# Altium PCB PCB1.PcbDoc
Units mm, origin at the board's own origin, x right, y up, seen from the top; angles counter-clockwise.
Board outline 46.1 x 19.94 mm, 4 copper layers (Top Layer, 5V, GND, Bottom Layer), stack 0.603 mm thick; 34 components, 41 nets, 163 pads, 40 vias.
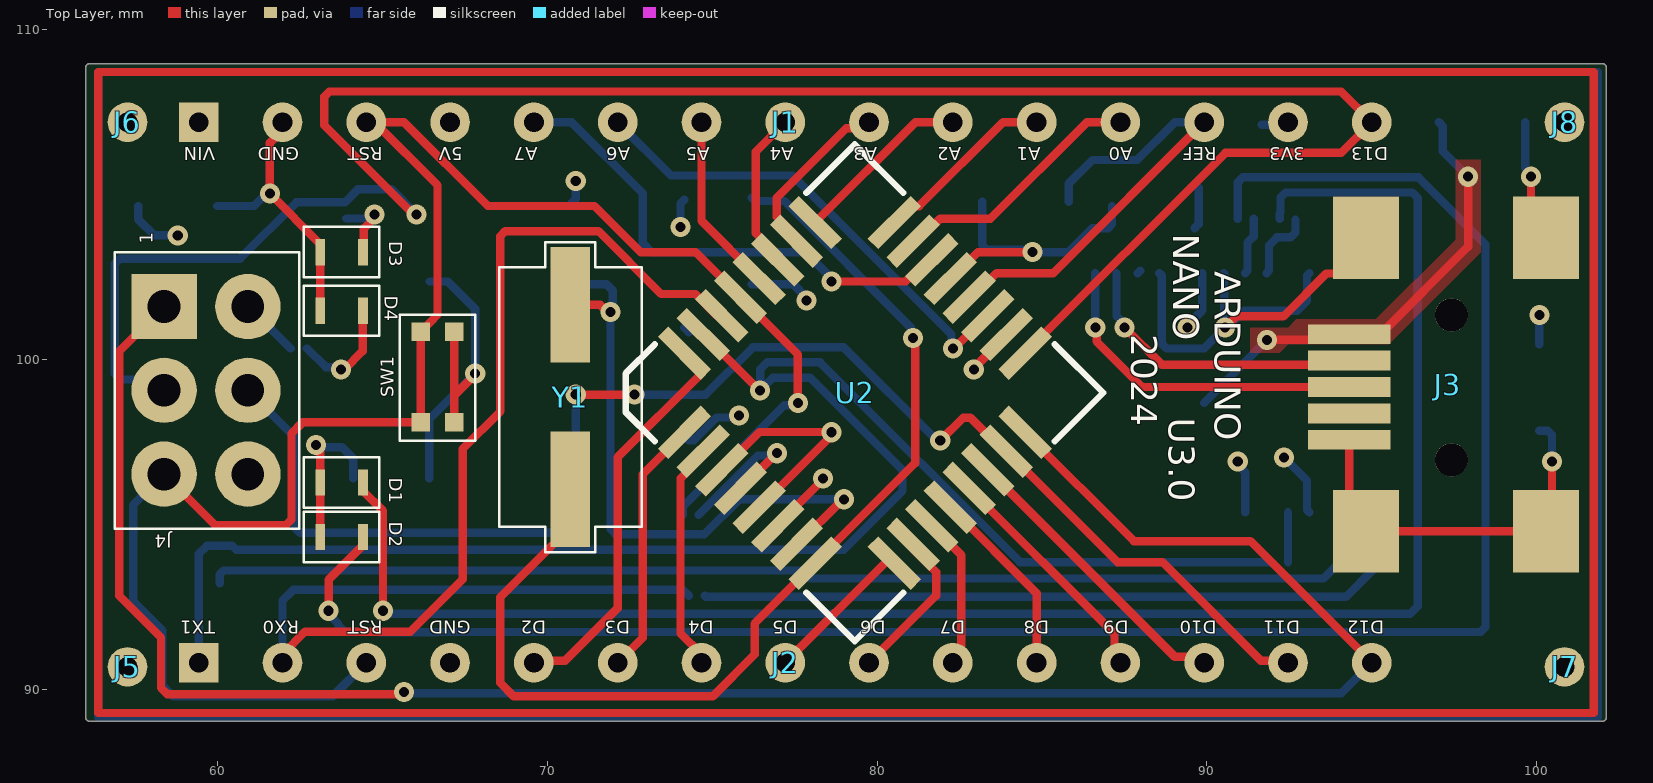
[diagram p0: Top Layer view]
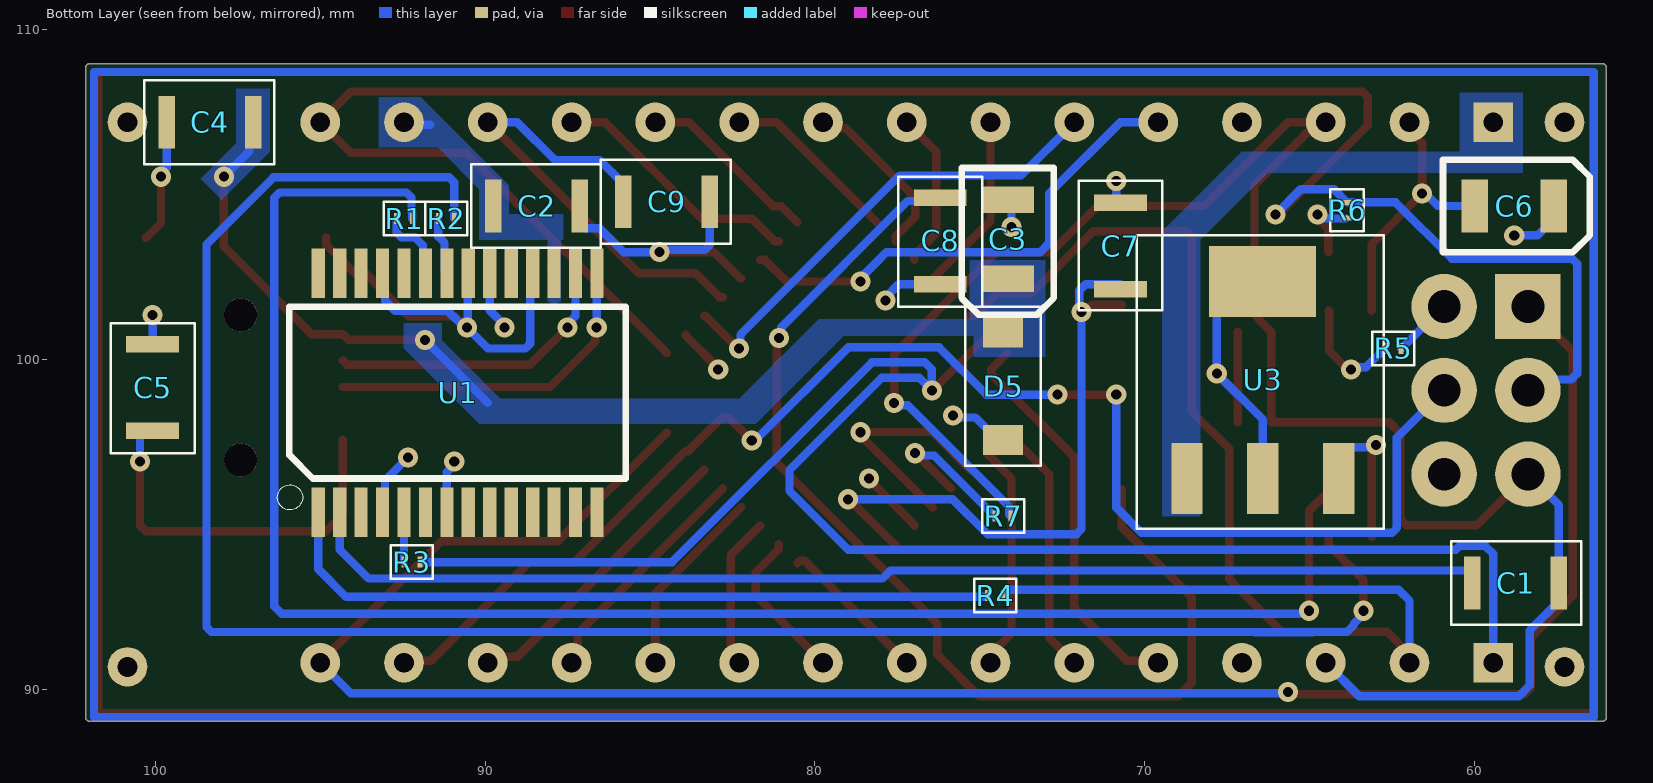
[diagram p1: Bottom Layer view, seen from below]
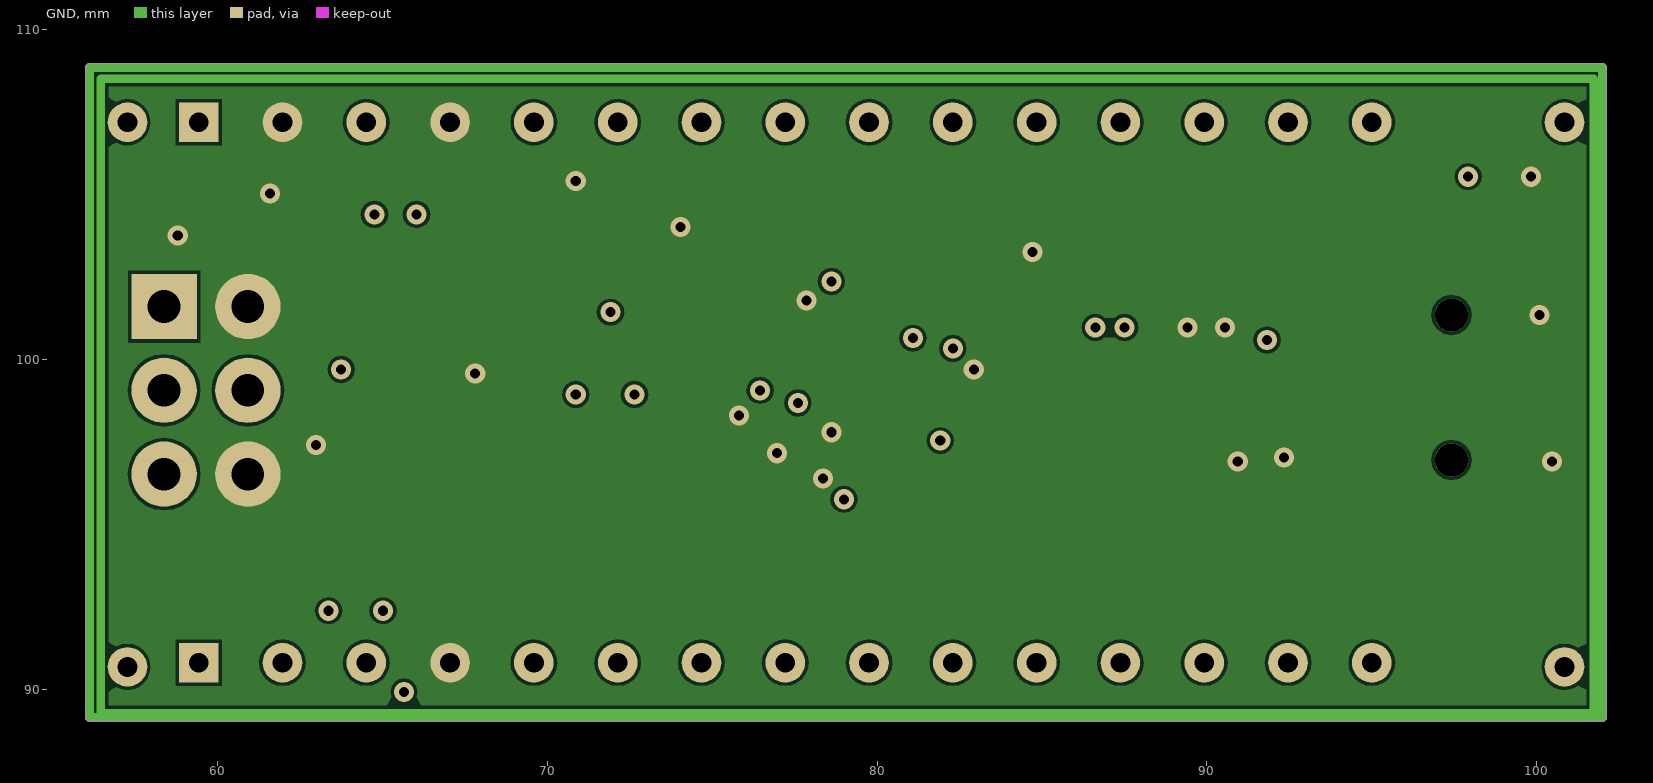
[diagram p2: GND]
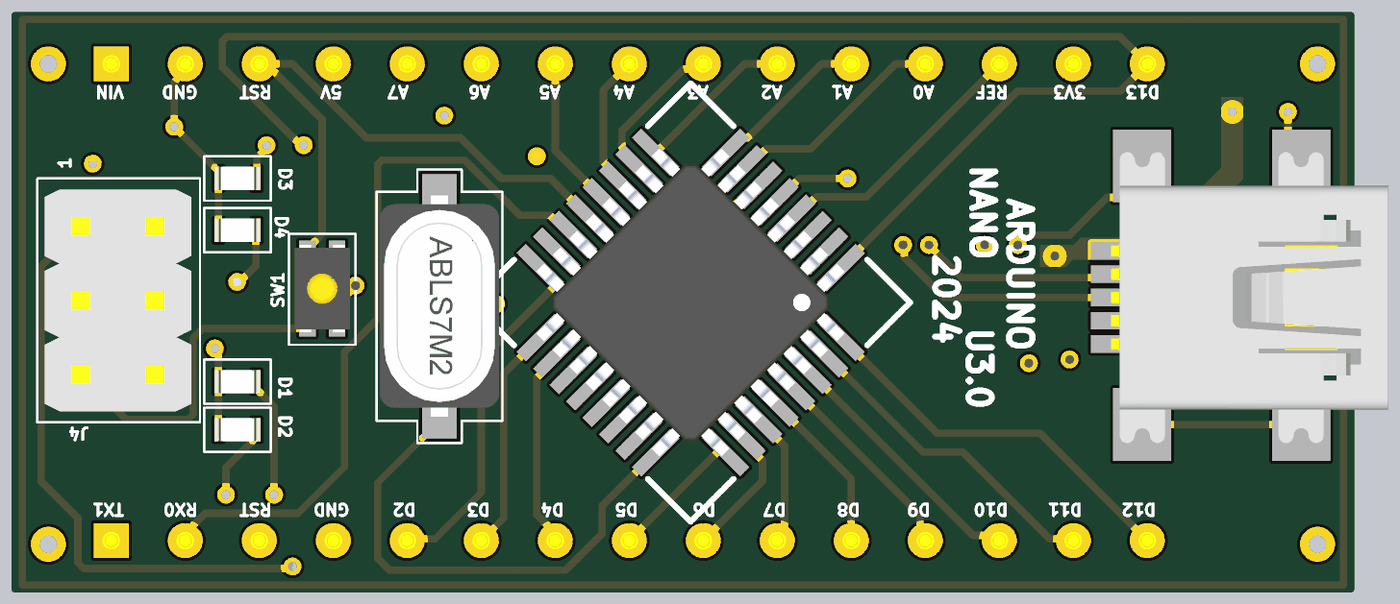
[diagram p3: 3D render of the assembled board from above, using the file's embedded part models]
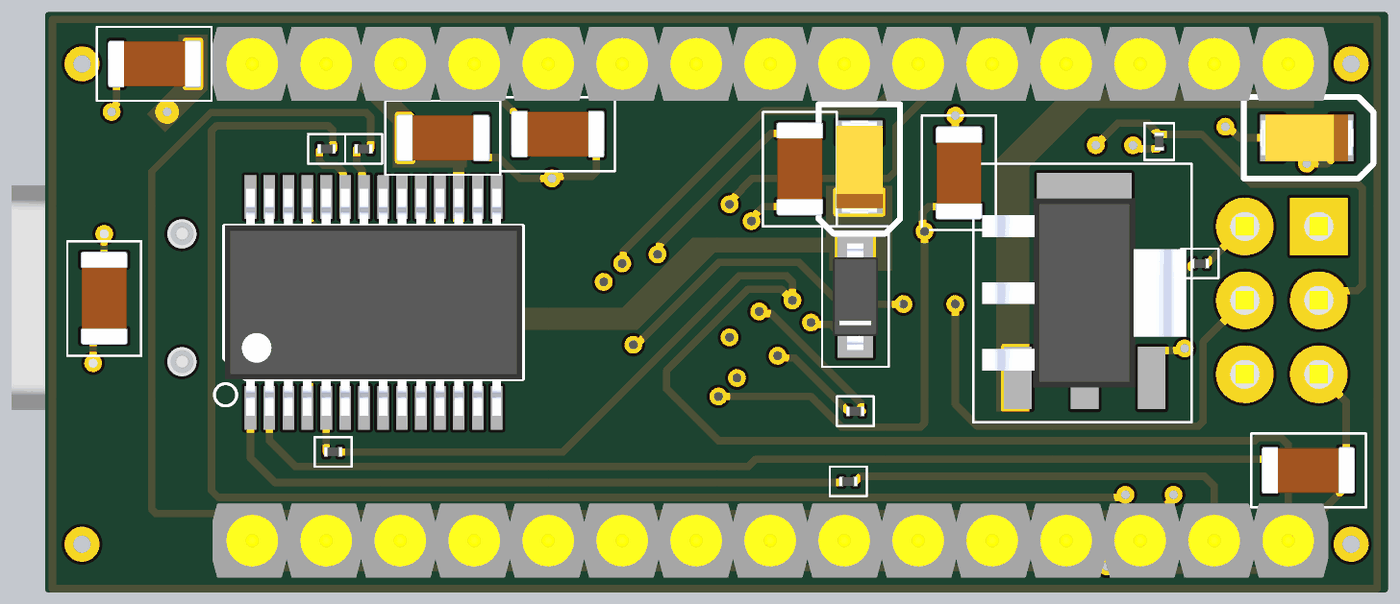
[diagram p4: 3D render of the assembled board from below, using the file's embedded part models]

## Layer stack, top to bottom
Top Solder: solder mask 0.0102, Solder Resist, Dk 3.5
Top Layer: signal copper 0.0356
Dielectric 2: prepreg 0.0711, PP-006, Dk 4.1
5V: signal copper 0.035
Dielectric 1: dielectric 0.32, FR-4, Dk 4.8
GND: signal copper 0.035
Dielectric 3: prepreg 0.0711, PP-006, Dk 4.1
Bottom Layer: signal copper 0.0356
Bottom Solder: solder mask 0.0102, Solder Resist, Dk 3.5

## Board outline
56.134,89.027 cw(c56.134,89.154) 56.007,89.154 56.007,108.839 cw(c56.134,108.839) 56.134,108.966 101.981,108.966 cw(c101.981,108.839) 102.108,108.839 102.108,89.154 cw(c101.981,89.154) 101.981,89.027

## Design rules (kind name [scope] priority, off if disabled: settings)
Clearance Clearance_3 [InNamedPolygon('3V3_L04_P004')] p1: gap=0.254 ignorepadtopadclearanceinfootprint=FALSE
Clearance POO [InNamedPolygon('NONET_L02_P002')] p2: gap=0.2 ignorepadtopadclearanceinfootprint=FALSE
Clearance Clearance_2 [InNamedPolygon('NONET_L02_P002')] p3: gap=0.2 ignorepadtopadclearanceinfootprint=FALSE
Clearance POLY_1 [InNamedPolygon('5V_L02_P001')] p4: gap=0.2 ignorepadtopadclearanceinfootprint=FALSE
Clearance Clearance_1 [InNamedPolygon('NONET_L01_P001')] p5: gap=0.254 ignorepadtopadclearanceinfootprint=FALSE
Clearance polyy [InNamedPolygon('NONET_L01_P001')] p6: gap=0.15 ignorepadtopadclearanceinfootprint=FALSE
Clearance poly [InNamedPolygon('NONET_L01_P001')] p7: gap=0.254 ignorepadtopadclearanceinfootprint=FALSE
Clearance [All] p8: gap=0.1 ignorepadtopadclearanceinfootprint=FALSE
PolygonConnect PolygonConnect_11 [All vs IsNamedPolygon('VIN_L04_P008')] p1: thpad.connectstyle=Direct thpad.reliefconductorwidth=0.254 thpad.reliefentries=4 thpad.polygonreliefangle="90 Angle" thpad.airgapwidth=0.254 smdpad.connectstyle=Direct smdpad.reliefconductorwidth=0.254 smdpad.reliefentries=4 smdpad.polygonreliefangle="90 Angle" smdpad.airgapwidth=0.254 via.connectstyle=Relief via.reliefconductorwidth=0.254 via.reliefentries=4 via.polygonreliefangle="90 Angle" via.airgapwidth=0.254
PolygonConnect PolygonConnect_10 [All vs IsNamedPolygon('VUSB_L04_P007')] p2: connectstyle=Direct reliefconductorwidth=0.254 reliefentries=4 polygonreliefangle="90 Angle" airgapwidth=0.254
PolygonConnect PolygonConnect_9 [All vs IsNamedPolygon('VUSB_L01_P006')] p3: connectstyle=Direct reliefconductorwidth=0.254 reliefentries=4 polygonreliefangle="90 Angle" airgapwidth=0.254
PolygonConnect PolygonConnect_8 [All vs IsNamedPolygon('VUSB_L04_P005')] p4: connectstyle=Direct reliefconductorwidth=0.254 reliefentries=4 polygonreliefangle="90 Angle" airgapwidth=0.254
PolygonConnect PolygonConnect_7 [All vs IsNamedPolygon('3V3_L04_P004')] p5: connectstyle=Direct reliefconductorwidth=0.254 reliefentries=4 polygonreliefangle="90 Angle" airgapwidth=0.254
PolygonConnect PolygonConnect_6 [All vs IsNamedPolygon('GND_L03_P002')] p6: connectstyle=Direct reliefconductorwidth=0.254 reliefentries=4 polygonreliefangle="90 Angle" airgapwidth=0.254
PolygonConnect PolygonConnect_5 [All vs IsNamedPolygon('5V_L02_P001')] p7: connectstyle=Direct reliefconductorwidth=0.254 reliefentries=4 polygonreliefangle="90 Angle" airgapwidth=0.254
PolygonConnect PolygonConnect_4 [All vs IsNamedPolygon('GND_L03_P002')] p8: thpad.connectstyle=Direct thpad.reliefconductorwidth=0.254 thpad.reliefentries=4 thpad.polygonreliefangle="90 Angle" thpad.airgapwidth=0.254 smdpad.connectstyle=Direct smdpad.reliefconductorwidth=0.254 smdpad.reliefentries=4 smdpad.polygonreliefangle="90 Angle" smdpad.airgapwidth=0.254 via.connectstyle=Relief via.reliefconductorwidth=0.254 via.reliefentries=4 via.polygonreliefangle="90 Angle" via.airgapwidth=0.254
PolygonConnect PolygonConnect_3 [All vs IsNamedPolygon('NONET_L02_P002')] p9: connectstyle=Direct reliefconductorwidth=0.254 reliefentries=4 polygonreliefangle="90 Angle" airgapwidth=0.254
PolygonConnect PolygonConnect_2 [All vs IsNamedPolygon('5V_L02_P001')] p10: connectstyle=Direct reliefconductorwidth=0.254 reliefentries=4 polygonreliefangle="90 Angle" airgapwidth=0.254
PolygonConnect PolygonConnect_1 [All vs IsNamedPolygon('5V_L02_P001')] p11: connectstyle=Direct reliefconductorwidth=0.254 reliefentries=4 polygonreliefangle="90 Angle" airgapwidth=0.254
PolygonConnect [All] p12: connectstyle=Relief reliefconductorwidth=0.254 reliefentries=4 polygonreliefangle="90 Angle" airgapwidth=0.254
RoutingVias [All] p1: holewidth=0.305 width=0.61 viastyle="Through Hole" minholewidth=0.305 minwidth=0.61 maxholewidth=0.305 maxwidth=0.61
SolderMaskExpansion [All] p1: expansion=0.102 istentingtop=FALSE
SupplyNets "Schematic Supply Nets_4" [InNet('3V3')] p1: voltage=0.000
SupplyNets "Schematic Supply Nets_3" [InNet('GND')] p2: voltage=0.000
SupplyNets "Schematic Supply Nets_2" [InNet('VUSB')] p3: voltage=0.000
SupplyNets "Schematic Supply Nets" [InNet('VIN')] p4: voltage=0.000
Width [All] p1: maxlimit=0.254 minlimit=0.254 preferedwidth=0.254
30 further rules are at their usual default settings.

## Components (designator, comment, footprint, x,y, rotation, side; value= is the part's Value field where it differs from the comment)
C1 "0.1uF" Capacitor 58.547,93.218 r0 bottom
C2 "0.1uF" Capacitor 88.646,104.648 r180 bottom
C3 "4.7uF" "polar Capacitor" 74.156,103.642 r270 bottom
C4 "0,1uF" Capacitor 98.552,107.188 r180 bottom
C5 "0.1uF" Capacitor 100.076,98.933 r90 bottom
C6 "4.7uF" "polar Capacitor" 58.801,104.648 r180 bottom
C7 "22pF" Capacitor 70.739,103.642 r270 bottom
C8 "22pF" Capacitor 76.2,103.378 r90 bottom
C9 "0.1uF" Capacitor 84.709,104.775 r180 bottom
D1 "LED_RX" LED 63.769,96.266 r180 top
D2 "LED_TX" LED 63.769,94.615 r180 top
D3 "LED" LED 63.769,103.251 r0 top
D4 "LED" LED 63.769,101.473 r0 top
D5 "MBR0520" MBR0520 74.295,99.187 r90 bottom
J1 "TS-115-G-AA" PCBComponent_1 59.436,107.315 r90 top
J2 "TS-115-G-AA" PCBComponent_1 59.436,90.932 r90 top
J3 "USB_MINI-B%C" "USB MINI_B" 94.31,100.762 r270 top
J4 "TLW-103-06-G-D" "pin header3x2" 59.563,99.441 r0 top
J5 "pin" PIN#1 57.277,90.678 r0 top
J6 "pin" PIN#2 57.277,107.188 r0 top
J7 "pin" PIN#2 100.838,90.678 r0 top
J8 "pin" PIN#2 100.838,107.188 r0 top
R1 "330" Resistor 92.442,104.267 r180 bottom
R2 "330" Resistor 91.172,104.267 r180 bottom
R3 "1K" Resistor 92.216,93.853 r0 bottom
R4 "1K" Resistor 74.535,92.837 r0 bottom
R5 "330" Resistor 62.47,100.33 r0 bottom
R6 "330" Resistor 63.867,104.521 r90 bottom
R7 "1K" Resistor 74.295,95.25 r180 bottom
SW1 "push button" "push button" 64.389,95.123 r0 top
U1 "FT232RL" FT232RL 105.436,108.135 r180 bottom
U2 "ATMEGA328" ATMEGEA328 74.163,97.785 r45 top
U3 "LM7805" LM7805 68.721,96.393 r180 bottom
Y1 "16MHz" "crystal - duplicate" 70.701,99.365 r90 top

## Footprints (in the part's own frame and the unit in brackets; to place one, negate y for a bottom-side part, rotate by r counter-clockwise, add the part's x,y. Pads: shape width x height; smd on the part's side, far side on the other; paste and mask are expansions set on the pad)
ATMEGEA328 [mm]
  rect 1.85x0.45 smd: 1(0,0) 2(0,-0.8) 3(0,-1.6) 4(0,-2.4) 5(0,-3.2) 6(0,-4) 7(0,-4.8) 8(0,-5.6) 17(9,-5.6) 18(9,-4.8) 19(9,-4) 20(9,-3.2) 21(9,-2.4) 22(9,-1.6) 23(9,-0.8) 24(9,0)
  rect 0.45x1.85 smd: 9(1.7,-7.3) 10(2.5,-7.3) 11(3.3,-7.3) 12(4.1,-7.3) 13(4.9,-7.3) 14(5.7,-7.3) 15(6.5,-7.3) 16(7.3,-7.3) 25(7.3,1.7) 26(6.5,1.7) 27(5.7,1.7) 28(4.9,1.7) 29(4.1,1.7) 30(3.3,1.7) 31(2.5,1.7) 32(1.7,1.7)
  silkscreen extent -0.82,-8.13 9.83,2.53, body extent 0,-7.29 9,1.71, height 1.2
Capacitor [mm]
  rect 0.5x1.6 smd: 1(-1.1,0) 2(1.524,0)
  silkscreen extent -1.78,-1.27 2.16,1.27, body extent -1.4,-0.8 1.8,0.8, height 0.95
"crystal - duplicate" [mm]
  rect 3.5x1.2 smd: 1(-3.302,0) 2(2.286,0)
  silkscreen extent -5.21,-2.16 4.19,2.16, body extent -4.3,-2.05 3.3,2.05, height 1.9
FT232RL [mm]
  rect 0.4x1.5 smd: 1(10.38,-12.769) 2(11.03,-12.769) 3(11.68,-12.769) 4(12.33,-12.769) 5(12.98,-12.769) 6(13.63,-12.769) 7(14.28,-12.769) 8(14.93,-12.769) 9(15.58,-12.769) 10(16.23,-12.769) 11(16.88,-12.769) 12(17.53,-12.769) 13(18.18,-12.769) 14(18.83,-12.769) 15(18.83,-5.519) 16(18.18,-5.519) 17(17.53,-5.519) 18(16.88,-5.519) 19(16.23,-5.519) 20(15.58,-5.519) 21(14.93,-5.519) 22(14.28,-5.519) 23(13.63,-5.519) 24(12.98,-5.519) 25(12.33,-5.519) 26(11.68,-5.519) 27(11.03,-5.519) 28(10.38,-5.519)
  silkscreen extent 9.14,-12.7 19.7,-6.54, body extent 9.51,-13.04 19.7,-5.24, height 2
LED [mm]
  rect 0.3x0.8 smd: 1(-0.65,0) 2(0.65,0)
  silkscreen extent -1.14,-0.76 1.14,0.76, body extent -0.8,-0.4 0.8,0.4, height 0.35
LM7805 [mm]
  rect 0.95x2.15 smd: 1(0,0) 2(2.3,0) 3(4.6,0)
  rect 3.25x2.15 smd: 4(2.286,5.969)
  silkscreen extent -1.52,-1.52 5.97,7.37, body extent -0.96,-0.58 5.54,6.42, height 1.8
MBR0520 [mm]
  rect 0.91x1.22 smd: 1(-1.635,0) 2(1.635,0)
  silkscreen extent -2.41,-1.14 2.41,1.14, body extent -1.83,-0.77 1.83,0.77, height 1.48
PCBComponent_1 [mm]
  rect 1.2x1.2 hole 0.6: 1(-0.127,0)
  round 1.2 hole 0.6: 2(-0.127,-2.54) 3(-0.127,-5.08) 4(-0.127,-7.62) 5(-0.127,-10.16) 6(-0.127,-12.7) 7(-0.127,-15.24) 8(-0.127,-17.78) 9(-0.127,-20.32) 10(-0.127,-22.86) 11(-0.127,-25.4) 12(-0.127,-27.94) 13(-0.127,-30.48) 14(-0.127,-33.02) 15(-0.127,-35.56)
  body extent -1.4,-36.93 1.14,1.37, height 3.48
PIN#1 [mm]
  round 1.2 hole 0.6: ""(0,0)
PIN#2 [mm]
  round 1.2 hole 0.6: 1(0,0)
"pin header3x2" [mil]
  rect 78x78 hole 39: 1(-46.32,85.03)
  round 78 hole 39: 2(-46.32,-14.97) 3(-46.32,-114.97) 4(53.68,85.03) 5(53.68,-14.97) 6(53.68,-114.97)
  silkscreen extent -105,-180 115,150, body extent -95,-165 103,135, height 195
"polar Capacitor" [mm]
  rect 0.8x1.6 smd: 1(-1.2,0) 2(1.2,0)
  silkscreen extent -2.16,-1.4 2.29,1.4, body extent -1.6,-0.8 1.6,0.8, height 1.8
"push button" [mm]
  rect 0.57x0.55 smd: 1(1.778,5.715) 2(1.778,2.972) 3(2.794,5.715) 4(2.794,2.972)
  silkscreen extent 1.14,2.41 3.43,6.22, body extent 1.34,2.84 3.24,5.84, height 0.6
Resistor [mm]
  rect 0.15x0.33 smd: 1(-0.24,0) 2(0.24,0)
  silkscreen extent -0.64,-0.51 0.64,0.51, body extent -0.3,-0.15 0.3,0.15, height 0.23
"USB MINI_B" [mm]
  rect 0.6x2.5 smd: 1(3.2,0) 2(2.4,0) 3(1.6,0) 4(0.8,0) 5(0,0)
  rect 2.5x2 smd: 6(-2.921,0.508) 7(5.969,0.508) 8(5.969,5.969) 9(-2.921,5.969)
  round 1 hole 1 unplated: ""(-0.584,3.099) ""(3.81,3.099)
  body extent -3.39,-0.56 6.6,8.94, height 3.9

## Part data
C1 C2 C4 C5 C7 C8 C9: library part capacitor
C3 C6: library part "polarized capcitor"
D1 D2: library part LED
J1 J2: library part Component_1
J4: library part "pin header3x2"
R1 R2 R3 R4 R5 R6 R7: library part resistor
U3: library part regulator
Y1: library part crystal_dub

## Via types
v1: diameter 0.61, hole 0.305, Top Layer to Bottom Layer, 40 vias

## Nets (pads, with @x,y where several pads share a name; then routed paths per layer and width w, separated by ;. In a path a pad name is that pad's centre, name@x,y a point inside that pad or via, vN(x,y) a via of type N, cw(c..) or ccw(c..) an arc to the next point about the centre after c; other vN are vias at no path point)
3V3: C2.1 J1.14 U1.17 | length 2.2
  Bottom Layer w0.254: U1.17 U1.17@87.979,102.689 ; C2.1@89.623,103.975 89.746,104.098 C2.1 C2.1@89.746,105.198 ; 91.656,107.108 92.376,107.108 J1.14
A0: J1.12 U2.23 | length 7.8
  Top Layer w0.254: U2.23 81.231,103.583 81.915,104.267 83.439,104.267 86.36,107.188 J1.12
A1: J1.11 U2.24 | length 5.6
  Top Layer w0.254: U2.24 81.022,104.644 81.276,104.644 83.82,107.188 J1.11
A2: J1.10 U2.25 | length 5.4
  Top Layer w0.254: U2.25 81.162,107.188 J1.10
A3: J1.9 U2.26 | length 5.3
  Top Layer w0.254: U2.26 77.557,103.721 76.962,104.316 76.962,104.902 79.067,107.007 79.575,107.007 J1.9
A4: J1.8 U2.27 | length 4.8
  Top Layer w0.254: U2.27 76.991,103.156 76.327,103.82 76.327,106.299 J1.8
A5: J1.7 U2.28 | length 5.5
  Top Layer w0.254: J1.7 74.676,104.201 U2.28
A6: J1.6 U2.19 | length 14.7
  Top Layer w0.254: v1(82.296,100.33) 82.33,100.33 83.321,101.32 U2.19
  Bottom Layer w0.254: J1.6 73.752,105.572 77.435,105.572 82.256,100.751 82.256,100.37 v1(82.296,100.33)
A7: J1.5 U2.22 | length 15.3
  Top Layer w0.254: v1(78.613,102.362) 80.864,102.362 81.519,103.017 U2.22
  Bottom Layer w0.254: J1.5 70.739,107.188 72.898,105.029 72.898,103.521 73.168,103.251 77.83,103.251 78.186,102.896 78.186,102.885 78.613,102.458 v1(78.613,102.362)
AREF: C9.1 J1.13 U2.20 | length 14.8
  Top Layer w0.254: U2.20 82.894,101.886 83.624,102.616 85.344,102.616 J1.13
  Bottom Layer w0.254: C9.1 85.809,105.325 86.529,106.045 87.884,106.045 89.027,107.188 J1.13
D0/RX: J2.2 R4.1 U2.30 | length 39.8
  Top Layer w0.254: J2.2 61.976,91.059 62.662,91.745 65.85,91.745 67.437,93.332 67.437,97.282 68.58,98.425 68.58,103.737 68.729,103.886 71.55,103.886 73.455,101.981 74.495,101.981 75.155,101.32 U2.30
  Bottom Layer w0.254: J2.2 61.976,92.688 62.303,93.015 74.117,93.015 R4.1
D1/TX: J2.1 R3.1 U2.31 | length 52.9
  Top Layer w0.254: U2.31 74.744,100.754 76.438,99.06 v1(76.454,99.06)
  Bottom Layer w0.254: J2.1 59.436,94.1 59.684,94.348 60.458,94.348 60.572,94.234 78.994,94.234 80.772,96.012 80.772,96.647 77.978,99.441 76.835,99.441 v1(76.454,99.06) 76.454,99.695 76.667,99.908 78.273,99.908 84.328,93.853 R3.1@91.924,93.853
D2: J2.5 U2.32 | length 12.2
  Top Layer w0.254: J2.5 69.655,90.864 70.544,90.864 72.136,92.456 72.136,97.034 74.658,99.555 74.658,99.694 U2.32
D3: J2.6 U2.1 | length 7.9
  Top Layer w0.254: J2.6 72.898,91.567 72.898,96.52 74.036,97.658 74.036,97.785 U2.1
D4: J2.7 U2.2 | length 7
  Top Layer w0.254: J2.7 74.676,91.061 74.041,91.696 74.041,96.393 74.728,97.08 U2.2
D5: J2.8 U2.9 | length 4.6
  Top Layer w0.254: J2.8 80.312,93.901 80.45,93.901 U2.9
D6: J2.9 U2.10 | length 4.7
  Top Layer w0.254: J2.9 81.788,92.837 81.788,93.556 81.092,94.252 U2.10
D7: J2.10 U2.11 | length 4.6
  Top Layer w0.254: U2.11 82.55,94.064 82.55,91.315 82.296,91.061 J2.10
D8: J2.11 U2.12 | length 5.8
  Top Layer w0.254: U2.12 84.836,92.909 J2.11
D9: J2.12 U2.13 | length 7.2
  Top Layer w0.254: U2.13 87.195,91.682 87.195,90.986 J2.12
D10: J2.13 U2.14 | length 9
  Top Layer w0.254: U2.14 89.022,90.986 89.735,90.986 J2.13
D11/MOSI: J2.14 J4.5 U2.15 | length 43.8
  Top Layer w0.254: v1(70.866,98.933) v1(72.644,98.933) ; v1(81.915,97.536) 82.613,98.234 82.823,98.234 83.838,97.219 U2.15 87.287,93.853 88.646,93.853 91.635,90.864 92.397,90.864 J2.14
  Bottom Layer w0.254: J4.5 62.357,97.63 62.357,94.891 62.506,94.742 70.104,94.742 70.866,95.504 v1(70.866,98.933) ; v1(72.644,98.933) 74.803,98.933 76.235,100.365 78.99,100.365 81.819,97.536 v1(81.915,97.536)
D12/MISO: J2.15 J4.1 U2.16 | length 63.3
  Top Layer w0.254: J4.1 57.023,100.237 57.023,92.837 58.293,91.567 58.293,90.043 58.488,89.848 65.591,89.848 v1(65.659,89.916) ; U2.16 87.783,94.488 91.313,94.488 J2.15
  Bottom Layer w0.254: v1(65.659,89.916) 65.7,89.875 94.066,89.875 J2.15
D13/SCK: J1.15 J4.2 R6.2 U2.17 | length 65.8
  Top Layer w0.254: v1(66.04,104.394) 65.944,104.394 63.246,107.092 63.246,107.969 63.395,108.118 94.066,108.118 J1.15 94.066,106.258 90.555,106.258 U2.17
  Bottom Layer w0.254: J4.2 58.056,99.391 57.073,99.391 56.896,99.568 56.896,102.904 57.045,103.053 60.691,103.053 62.398,104.761 R6.2 64.262,105.156 65.278,105.156 v1(66.04,104.394)
GND: C2.2 C3.1 C4.1 C5.1 C5.2 C6.1 C6.2 C7.1 C8.1 C9.2 D1.2 D2.2 D3.1 D4.1 D5.1 J1.2 J1.4 J2.4 J3.1 J3.6 J3.7 J3.8 J3.9 J4.4 J4.6 R5.1 R7.1 SW1.3 SW1.4 U1.4 U1.7 U1.18 U1.20 U1.21 U1.25 U2.3 U2.4 U2.5 U2.6 U2.18 U2.21 U3.2 U3.3 U3.4 | length 94.5
  Top Layer w0.254: J1.2 61.976,106.947 61.595,106.566 61.595,105.025 63.119,103.501 D3.1 D4.1 ; v1(62.992,97.409) 62.992,97.313 63.119,97.186 D1.2 D2.2 ; SW1.4 67.183,98.902 ; SW1.3 67.183,98.902 ; v1(67.818,99.568) 67.818,99.537 67.183,98.902 ; U2.3 76.438,97.797 78.606,97.797 v1(78.613,97.79) 78.545,97.722 78.545,97.618 76.449,95.522 U2.5 ; U2.4 75.877,96.088 76.945,97.155 v1(76.962,97.155) ; U2.6 76.991,94.991 78.359,96.359 v1(78.359,96.393) ; U2.21 82.259,102.451 83.059,103.251 v1(84.709,103.251) ; v1(82.931,99.695) 82.931,99.73 83.921,100.72 U2.18 ; v1(90.551,100.965) 90.889,101.303 92.315,101.303 93.616,102.604 93.945,102.604 94.818,103.477 J3.6 ; J3.1 94.31,95.301 J3.7 J3.8 100.457,94.971 v1(100.457,96.901) ; v1(99.822,105.537) 99.822,104.14 J3.9
  Bottom Layer w0.254: C6.2 57.601,104.248 58.09,103.759 v1(58.801,103.759) ; C6.1 61.118,104.648 61.499,105.029 v1(61.595,105.029) ; J4.4 60.945,101.601 62.216,100.33 R5.1 ; v1(62.992,97.409) 63.06,97.341 63.773,97.341 64.121,96.993 U3.3 ; U3.2 66.421,98.171 v1(67.818,99.568) 67.818,101.529 66.985,102.362 U3.4 ; C7.1 70.743,104.742 70.866,104.865 v1(70.866,105.41) ; v1(74.041,104.013) 74.041,104.727 C3.1 ; D5.1 74.45,97.552 75.137,98.239 75.76,98.239 v1(75.819,98.298) ; R7.1@74.587,95.288 76.386,97.087 76.894,97.087 v1(76.962,97.155) ; C8.1 77.458,102.278 77.859,101.877 v1(77.859,101.787) ; C9.2 83.185,103.468 83.334,103.319 84.641,103.319 v1(84.709,103.251) 85.802,103.251 86.526,103.975 86.999,103.975 87.122,104.098 C2.2 ; U1.18 88.629,102.543 88.629,100.479 88.778,100.33 89.916,100.33 v1(90.551,100.965) ; v1(89.413,100.97) 89.413,101.042 89.856,101.485 U1.20 ; U1.21 90.529,102.593 90.529,100.987 v1(90.551,100.965) ; v1(90.932,96.901) 90.932,96.805 91.156,96.581 U1.7 ; v1(92.329,97.028) 93.033,96.324 93.033,95.439 U1.4 ; U1.25 93.033,102.543 93.033,101.776 92.73,101.473 91.132,101.473 90.624,100.965 v1(90.551,100.965) ; C4.1 99.652,105.803 99.822,105.633 v1(99.822,105.537) ; C5.1 100.334,97.833 100.457,97.71 v1(100.457,96.901) ; C5.2 v1(100.076,101.346)
NetC1_2: C1.2 U1.2 | length 36.2
  Bottom Layer w0.254: C1.2 60.071,93.476 60.194,93.599 77.713,93.599 77.954,93.358 93.529,93.358 94.406,94.235 U1.2
NetC7_2: C7.2 U2.7 Y1.2 | length 19.6
  Top Layer w0.254: Y1.2 71.608,101.651 71.786,101.473 v1@71.882,101.473 ; U2.7 77.592,94.39 78.959,95.758 v1(78.994,95.758)
  Bottom Layer w0.254: C7.2@70.862,102.155 70.739,102.278 71.795,102.278 71.987,102.086 71.987,101.498 v1(71.919,101.43) 71.919,94.853 72.068,94.704 74.768,94.704 75.822,95.758 v1(78.994,95.758)
NetC8_2: C8.2 U2.8 Y1.1 | length 33.6
  Top Layer w0.254: Y1.1 70.701,94.913 68.58,92.792 68.58,90.192 68.983,89.789 75.021,89.789 76.286,91.054 76.286,91.988 U2.8 81.153,96.855 81.153,100.575 v1(81.085,100.643)
  Bottom Layer w0.254: C8.2 76.302,104.8 77.191,104.8 81.017,100.974 81.017,100.711 v1(81.085,100.643)
NetD1_1: D1.1 R1.2 | length 53
  Top Layer w0.254: D1.1 64.419,96.016 65.024,95.411 v1(65.024,92.38)
  Bottom Layer w0.254: v1(65.024,92.38) 65.092,92.312 65.264,92.312 65.285,92.291 96.165,92.291 96.393,92.519 96.393,104.89 96.225,105.058 92.379,105.058 92.23,104.909 92.23,104.462 92.202,104.434 R1.2
NetD2_1: D2.1 R2.2 | length 59.3
  Top Layer w0.254: v1(63.373,92.38) 63.373,93.319 64.419,94.365 D2.1
  Bottom Layer w0.254: v1(63.373,92.38) 63.373,92.284 63.658,91.998 63.658,91.951 63.874,91.735 64.901,91.735 64.913,91.723 66.659,91.723 66.671,91.735 98.296,91.735 98.444,91.884 98.444,103.486 96.415,105.515 91.081,105.515 90.932,105.366 R2.2
NetD3_2: D3.2 R6.1 | length 2.2
  Top Layer w0.254: D3.2 64.442,103.274 64.442,103.97 64.765,104.293 v1(64.765,104.389)
  Bottom Layer w0.254: R6.1@63.905,104.272 64.552,104.272 64.669,104.389 v1(64.765,104.389)
NetD4_2: D4.2 R5.2 | length 3.4
  Top Layer w0.254: v1(63.754,99.695) 63.85,99.695 64.404,100.249 64.404,101.458 D4.2
  Bottom Layer w0.254: R5.2 62.724,100.33 63.291,99.763 63.686,99.763 v1(63.754,99.695)
NetR1_1: R1.1 U1.23 | length 2.2
  Bottom Layer w0.254: U1.23 91.879,102.689 91.879,103.456 92.119,103.696 92.535,103.696 92.684,103.845 R1.1@92.684,104.229
NetR2_1: R2.1 U1.22 | length 1.8
  Bottom Layer w0.254: U1.22 91.229,102.689 91.229,103.538 91.412,103.721 R2.1
RESET: C1.1 J1.3 J2.3 J4.3 R7.2 SW1.1 SW1.2 U2.29 | length 57.8
  Top Layer w0.254: J4.3 59.933,94.974 62.081,94.974 62.247,95.14 62.247,97.751 62.591,98.095 SW1.2 SW1.1 66.177,100.838 66.325,100.986 66.325,100.996 66.568,101.239 66.568,101.25 66.675,101.357 66.675,105.283 J1.3@64.77,107.188 ; J1.3 J1.3@64.77,107.188 ; v1(77.597,98.679) 77.597,100.148 74.494,103.251 72.832,103.251 71.435,104.648 68.199,104.648 65.659,107.188 J1.3@64.77,107.188
  Bottom Layer w0.254: J4.3 57.447,95.581 C1.1 57.447,92.668 58.334,91.781 58.334,90.113 58.658,89.789 63.5,89.789 J2.3 ; R7.2 74.069,95.25 74.107,95.288 74.107,95.529 77.189,98.611 77.529,98.611 v1(77.597,98.679)
RX: R4.2 U1.1 | length 22.4
  Bottom Layer w0.254: R4.2 74.813,92.799 94.211,92.799 95.056,93.644 U1.1
TX: R3.2 U1.5 | length 1.5
  Bottom Layer w0.254: R3.2 U1.5
USBDM: J3.4 U1.16 | length 9.1
  Top Layer w0.254: v1(87.503,100.965) 88.63,99.838 94.186,99.838 J3.4
  Bottom Layer w0.254: U1.16 87.256,101.308 87.503,101.061 v1(87.503,100.965)
USBDP: J3.3 U1.15 | length 10.3
  Top Layer w0.254: v1(86.614,100.965) 86.654,100.925 86.654,100.544 88.036,99.162 J3.3
  Bottom Layer w0.254: U1.15 86.61,102.612 86.61,100.969 v1(86.614,100.965)
VIN: J1.1 U3.1 | length 0
VUSB: C3.2 C4.2 D5.2 J3.5 | length 14.3
  Top Layer w0.254: v1(91.821,100.584) 91.829,100.592 94.14,100.592 J3.5 95.26,100.762 97.917,103.419 v1(97.917,105.537)
  Bottom Layer w0.254: D5.2@74.156,100.961 D5.2 ; 89.916,98.679 v1(91.821,100.584) ; C4.2 97.151,107.065 97.151,106.303 v1(97.917,105.537)
pads on no net: J3. J3.2 J5. J6.1 J7.1 J8.1 U1.3 U1.6 U1.8 U1.9 U1.10 U1.11 U1.12 U1.13 U1.14 U1.19 U1.24 U1.26 U1.27 U1.28
copper on no net: | length 519.6
  Top Layer w0.254: 56.388,89.281 101.727,89.281 101.727,108.712 56.388,108.712 56.388,89.281
  GND w0.254: 56.134,89.154 101.981,89.154 101.981,108.839 56.134,108.839 56.134,89.154 ; 56.471,89.281 101.727,89.281 101.727,108.502 56.471,108.502 56.471,89.281
  Bottom Layer w0.254: 56.388,89.154 101.854,89.154 101.854,108.712 56.388,108.712 56.388,89.154

## Polygon pours and split planes (outlines as drawn)
VUSB on Bottom Layer "VUSB_L04_P007" (solid, remove dead copper, pour order 7): 92.456,101.092 92.456,100.33 90.17,98.044 81.788,98.044 79.121,100.711 75.184,100.711 75.184,100.076 73.025,100.076 73.025,102.997 75.311,102.997 75.311,101.219 79.883,101.219 82.296,98.806 89.535,98.806 91.313,100.584 91.313,101.092
VIN on Bottom Layer "VIN_L04_P008" (solid, remove dead copper, pour order 8): 58.547,108.077 58.547,105.664 66.294,105.664 68.326,103.632 68.326,95.25 69.469,95.25 69.469,103.886 67.056,106.299 60.452,106.299 60.452,108.077
VUSB on Bottom Layer "VUSB_L04_P005" (solid, remove dead copper, pour order 5): 97.536,108.204 97.536,106.553 98.615,105.474 97.98,104.838 96.52,106.299 96.52,108.204 96.901,108.204
3V3 on Bottom Layer "3V3_L04_P004" (solid, remove dead copper, pour order 4): 93.218,107.95 91.948,107.95 89.281,105.283 89.281,104.394 87.63,104.394 87.63,101.6 88.138,101.6 88.138,103.632 90.17,103.632 90.17,105.156 91.44,106.426 93.218,106.426
VUSB on Top Layer "VUSB_L01_P006" (solid, remove dead copper, pour order 6): 97.536,106.045 98.298,106.045 98.298,103.251 95.504,100.457 92.456,100.457 92.202,100.203 91.313,100.203 91.313,100.965 92.456,100.965 92.71,101.219 95.123,101.219 97.536,103.632
GND on GND "GND_L03_P002" (solid, remove dead copper, pour order 2): 25.4,25.4 177.8,25.4 177.8,127 25.4,127

## Other copper
Top Layer:
  text "Yassin Khadrawy" at 60.071,85.979 h1.52
  text "9 / 2024" at 84.074,85.725 h1.52

## Silkscreen, mask and mechanical layers (free items; w line width, h text height)
Top Overlay:
  text "VIN" at 59.941,106.423 h0.4 r180
  text "GND" at 62.481,106.423 h0.4 r180
  text "RST" at 65.021,106.423 h0.4 r180
  text "5V" at 67.434,106.423 h0.4 r180
  text "A7" at 69.72,106.423 h0.4 r180
  text "A6" at 72.514,106.423 h0.4 r180
  text "A5" at 74.927,106.423 h0.4 r180
  text "A4" at 77.467,106.423 h0.4 r180
  text "A3" at 80.007,106.423 h0.4 r180
  text "A2" at 82.547,106.423 h0.4 r180
  text "A1" at 84.96,106.423 h0.4 r180
  text "A0" at 87.754,106.423 h0.4 r180
  text "REF" at 90.294,106.423 h0.4 r180
  text "3V3" at 92.961,106.423 h0.4 r180
  text "D13" at 95.501,106.423 h0.4 r180
  text "NANO" at 88.973,103.813 h0.8 r270
  text "1" at 58.036,103.508 h0.4 r90
  text "ARDUINO" at 90.243,102.67 h0.8 r270
  text "2024" at 87.703,100.765 h0.8 r270
  text "U3.0" at 88.846,98.225 h0.8 r270
  text "TX1" at 59.941,92.072 h0.4 r180
  text "RX0" at 62.481,92.072 h0.4 r180
  text "RST" at 65.021,92.072 h0.4 r180
  text "GND" at 67.688,92.072 h0.4 r180
  text "D2" at 69.974,92.072 h0.4 r180
  text "D3" at 72.514,92.072 h0.4 r180
  text "D4" at 75.054,92.072 h0.4 r180
  text "D5" at 77.594,92.072 h0.4 r180
  text "D6" at 80.261,92.072 h0.4 r180
  text "D7" at 82.674,92.072 h0.4 r180
  text "D8" at 85.214,92.072 h0.4 r180
  text "D9" at 87.627,92.072 h0.4 r180
  text "D10" at 90.294,92.072 h0.4 r180
  text "D11" at 92.834,92.072 h0.4 r180
  text "D12" at 95.374,92.072 h0.4 r180